# Altium PCB PCB1.PcbDoc
Units mm, origin at the board's own origin, x right, y up, seen from the top; angles counter-clockwise.
Board outline 100 x 75 mm, 2 copper layers (Top Layer, Bottom Layer), stack 1.671 mm thick; 31 components, 20 nets, 120 pads, 1 vias.
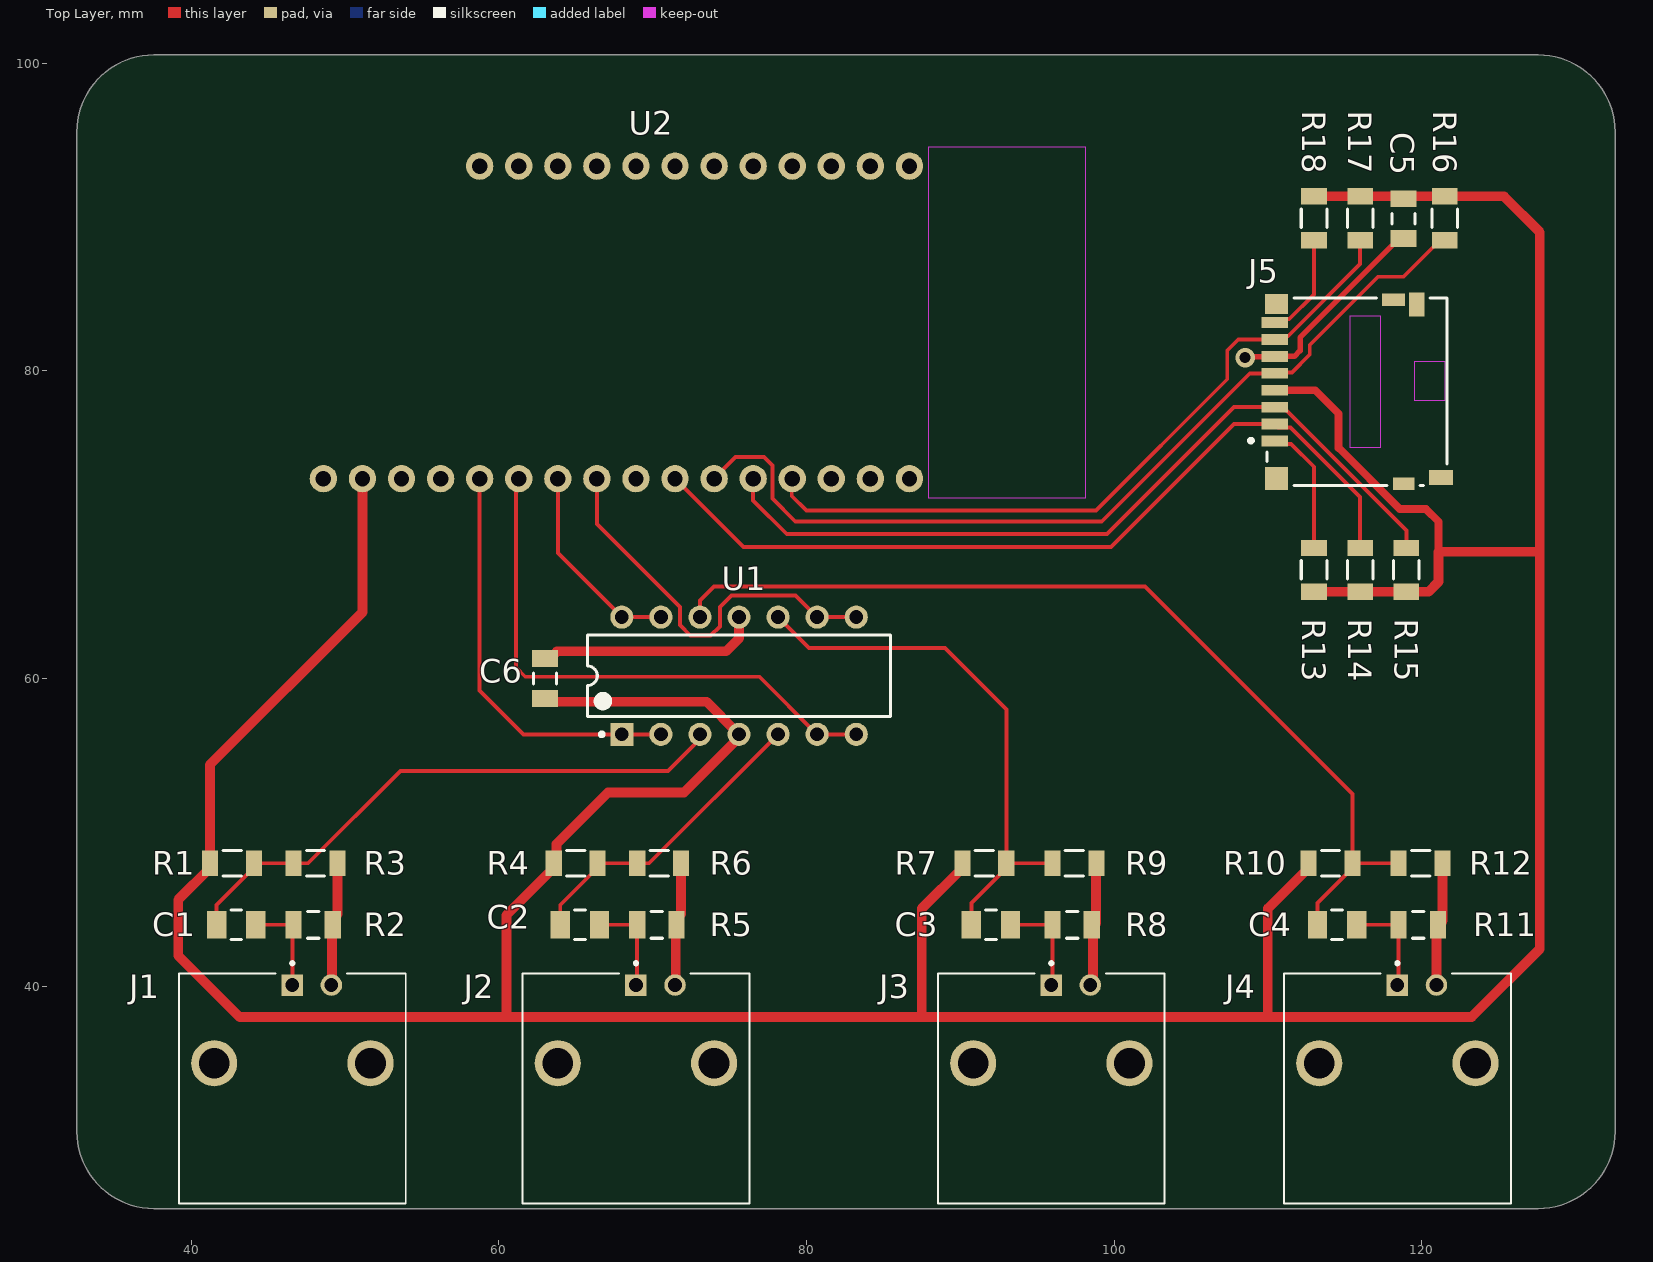
[diagram p0: Top Layer view]
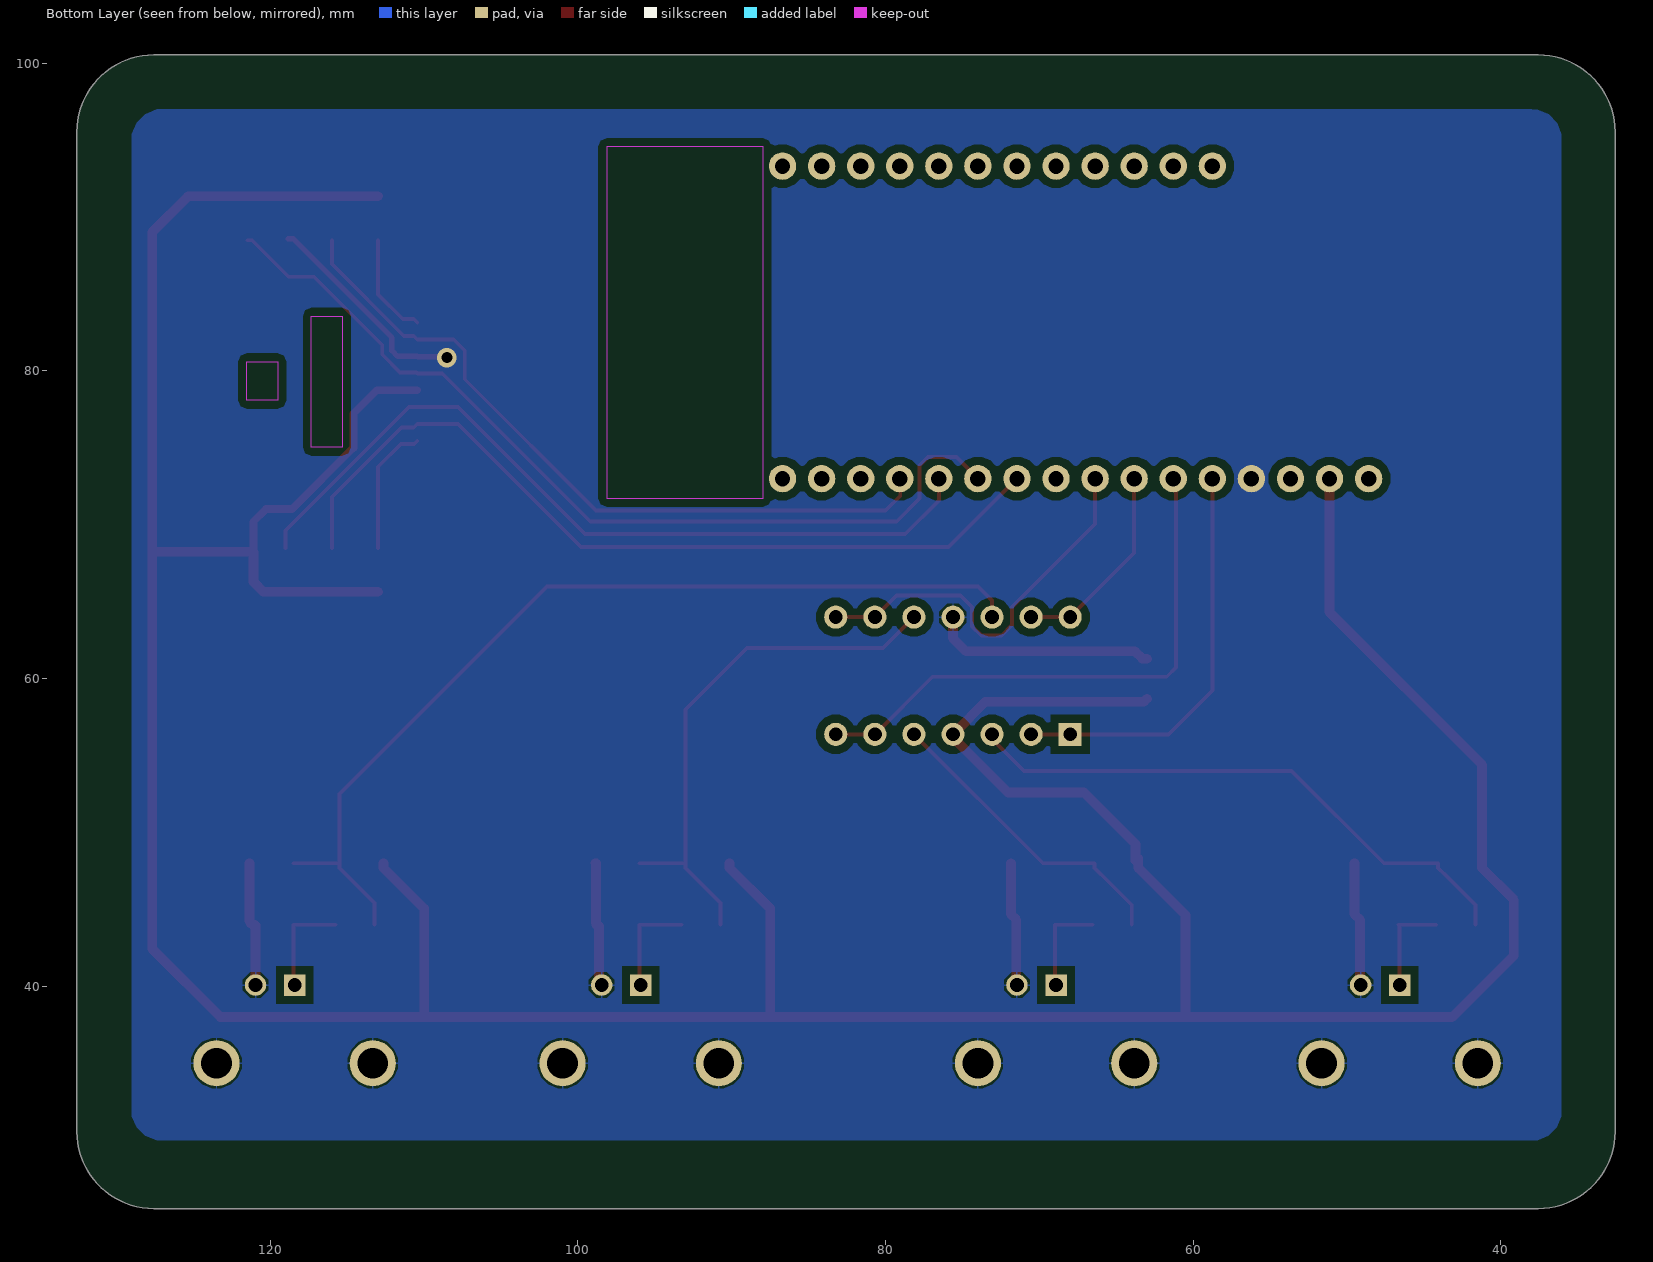
[diagram p1: Bottom Layer view, seen from below]
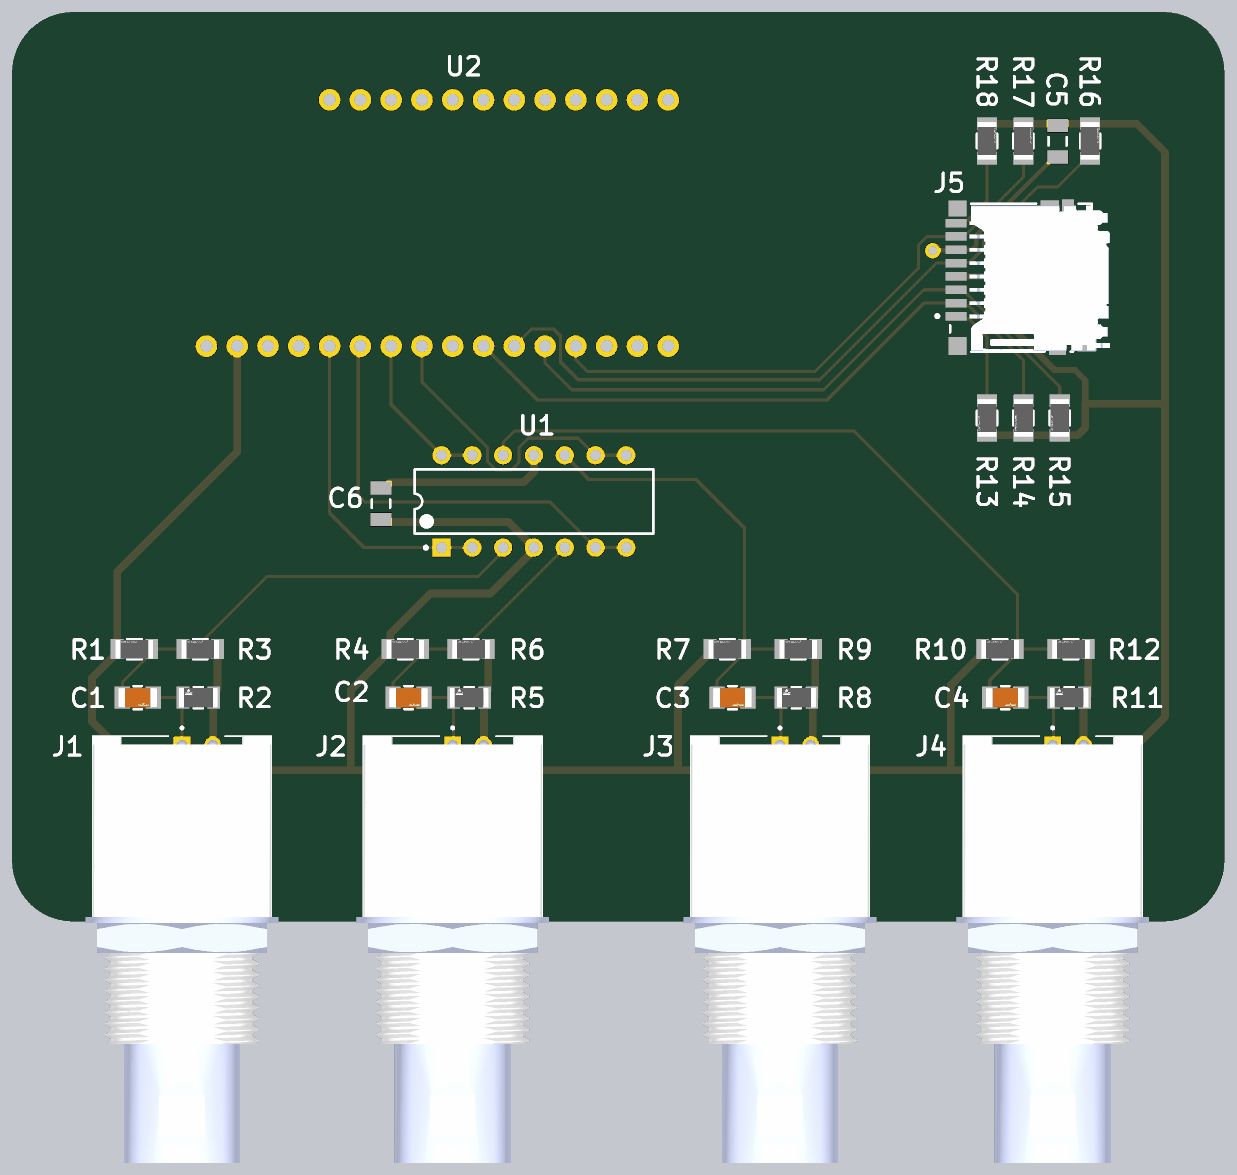
[diagram p2: 3D render of the assembled board from above, using the file's embedded part models]

## Layer stack, top to bottom
Top Solder: solder mask 0.0102, Solder Resist, Dk 3.5
Top Layer: signal copper 0.0356
Dielectric 1: dielectric 1.6, FR-4, Dk 4.8
Bottom Layer: signal copper 0.0356
Bottom Solder: solder mask 0.0102, Solder Resist, Dk 3.5

## Board outline
32.575,30.55 32.575,95.55 cw(c37.575,95.55) 37.575,100.55 127.575,100.55 cw(c127.575,95.55) 132.575,95.55 132.575,30.55 cw(c127.575,30.55) 127.575,25.55 37.575,25.55 cw(c37.575,30.55)

## Design rules (kind name [scope] priority, off if disabled: settings)
BoardOutlineClearance [All] p1: gap=0.2 ignorepadtopadclearanceinfootprint=FALSE
Clearance [All] p1: gap=0.127 ignorepadtopadclearanceinfootprint=TRUE except(0.254: Arc-Hole Track-Hole SMDPad-Hole THPad-Hole Via-Hole Fill-Hole Poly-Hole Region-Hole Text-Hole)
ComponentClearance [All] p1: gap=0.127 collisioncheckmode=3 verticalgap=0.127 showdistances=TRUE
DiffPairsRouting [All] p1: maxlimit=0.254 minlimit=0.127 mostfreqgap=0.127 toplayer_minwidth=0.127 toplayer_maxwidth=25.4 toplayer_prefwidth=0.127 bottomlayer_minwidth=0.127 bottomlayer_maxwidth=25.4 bottomlayer_prefwidth=0.127 maxuncoupledlength=12.7
Height [All] p1: minheight=0 maxheight=1816.048 prefheight=12.7
HoleSize [All] p1: absolutevalues=TRUE maxlimit=6.3 minlimit=0.3 maxpercent=80.000 minpercent=20.000
HoleToHoleClearance [All] p1: gap=0.254 allowstackedmicrovias=FALSE
MinimumAnnularRing [All] p1: minimumring=0.152
MinimumSolderMaskSliver [All] p1: minsoldermaskwidth=0.152
PlaneClearance [All] p1: clearance=0.127
PlaneConnect PlaneConnectPowerPads [InPadClass('PowerPads')] p1: planeconnectstyle=Direct reliefexpansion=0.508 reliefentries=4 reliefconductorwidth=0.254 reliefairgap=0.254
PlaneConnect [All] p2: pad.planeconnectstyle=Relief pad.reliefexpansion=0.3 pad.reliefentries=4 pad.reliefconductorwidth=0.127 pad.reliefairgap=0.127 via.planeconnectstyle=Direct via.reliefexpansion=0.3 via.reliefentries=4 via.reliefconductorwidth=0.127 via.reliefairgap=0.127
PolygonConnect PolygonConnectPowerPads [All vs (InPadClass('PowerPads'))] p1: connectstyle=Direct reliefconductorwidth=0.254 reliefentries=4 polygonreliefangle="90 Angle" airgapwidth=0.254
PolygonConnect [All] p2: thpad.connectstyle=Relief thpad.reliefconductorwidth=0.127 thpad.reliefentries=4 thpad.polygonreliefangle="90 Angle" thpad.airgapwidth=0.127 smdpad.connectstyle=Relief smdpad.reliefconductorwidth=0.127 smdpad.reliefentries=4 smdpad.polygonreliefangle="90 Angle" smdpad.airgapwidth=0.127 via.connectstyle=Direct via.reliefconductorwidth=0.127 via.reliefentries=4 via.polygonreliefangle="90 Angle" via.airgapwidth=0.127
RoutingVias [All] p1: holewidth=0.3 width=0.6 viastyle="Through Hole" minholewidth=0.3 minwidth=0.6 maxholewidth=0.6 maxwidth=6.6
SilkToSilkClearance [All] p1: silktosilkclearance=0.127
SilkToSolderMaskClearance [IsPad] p1: minsilkscreentomaskgap=0.127 clearancetoexposedcopper=TRUE
SolderMaskExpansion [All] p1: expansion=0.051 istentingtop=FALSE
UnRoutedNet [All] p1: checkbadconnections=TRUE
Width Width_10mil [All] p1: maxlimit=25.4 minlimit=0.254 preferedwidth=0.254 minimp=50.000000 maximp=50.000000 favimp=50.000000
Width Width_6mil [All] p2: maxlimit=25.4 minlimit=0.152 preferedwidth=0.152 minimp=50.000000 maximp=50.000000 favimp=50.000000
Width Power_20mil [All] p3: maxlimit=25.4 minlimit=0.508 preferedwidth=0.508 minimp=50.000000 maximp=50.000000 favimp=50.000000
Width Power_12mil [All] p4: maxlimit=25.4 minlimit=0.305 preferedwidth=0.305 minimp=50.000000 maximp=50.000000 favimp=50.000000
Width Width_5mil [All] p5: maxlimit=25.4 minlimit=0.127 preferedwidth=0.127 minimp=50.000000 maximp=50.000000 favimp=50.000000
19 further rules are at their usual default settings.

## Classes and differential pairs
component class Sheet2: C5 J5 R13 R14 R15 R16 R17 R18
component class Sheet1: C1 C2 C3 C4 C6 J1 J2 J3 J4 R1 R2 R3 R4 R5 R6 R7 R8 R9 R10 R11 R12 U2

## Components (designator, comment, footprint, x,y, rotation, side; value= is the part's Value field where it differs from the comment)
C1 "100u" FP-GRM31C-0_3-e0_3_0_8-IPC_C 42.935,44 r0 top
C2 "100u" FP-GRM31C-0_3-e0_3_0_8-IPC_C 65.275,44 r0 top
C3 "100u" FP-GRM31C-0_3-e0_3_0_8-IPC_C 92,44 r0 top
C4 "100u" FP-GRM31C-0_3-e0_3_0_8-IPC_C 114.5,44 r0 top
C5 "1u" CAPC3216X110X50LL20T25 118.825,89.9 r90 top
C6 "1u" CAPC3216X110X50LL20T25 63,60 r270 top
J1 "CONBNC002" LINX_CONBNC002 46.58,35 r0 top
J2 "CONBNC002" LINX_CONBNC002 68.92,35 r0 top
J3 "CONBNC002" LINX_CONBNC002 95.92,35 r0 top
J4 "CONBNC002" LINX_CONBNC002 118.42,35 r0 top
J5 "1140084168" FP-1140084168-0 115.8,78.65 r270 top
R1 "10k" FP-CR1206-IPC_B 42.66,48 r180 top
R2 "1Meg" FP-CRCW1206-e3-MFG 47.935,44 r180 top
R3 "10k" FP-CR1206-IPC_B 48.087,48 r180 top
R4 "10k" FP-CR1206-IPC_B 65,48 r180 top
R5 "1Meg" FP-CRCW1206-e3-MFG 70.275,44 r180 top
R6 "10k" FP-CR1206-IPC_B 70.427,48 r180 top
R7 "10k" FP-CR1206-IPC_B 91.573,48 r180 top
R8 "1Meg" FP-CRCW1206-e3-MFG 97.275,44 r180 top
R9 "10k" FP-CR1206-IPC_B 97.427,48 r180 top
R10 "10k" FP-CR1206-IPC_B 114.073,48 r180 top
R11 "1Meg" FP-CRCW1206-e3-MFG 119.775,44 r180 top
R12 "10k" FP-CR1206-IPC_B 119.927,48 r180 top
R13 "10k" FP-CR1206-IPC_B 113,67.073 r270 top
R14 "10k" FP-CR1206-IPC_B 116,67.073 r270 top
R15 "10k" FP-CR1206-IPC_B 119,67.073 r270 top
R16 "10k" FP-CR1206-IPC_B 121.5,89.927 r90 top
R17 "10k" FP-CR1206-IPC_B 116,89.927 r90 top
R18 "10k" FP-CR1206-IPC_B 113,89.927 r90 top
U1 "MCP6004-I/P" PDIP300-P14 75.62,60.19 r90 top
U2 "Particle Photon 2 Wi-Fi enabled development kit   Footprint and formfactor based on Adafruit Feather." PHOTON2 93.05,71.73 r90 top

## Footprints (in the part's own frame and the unit in brackets; to place one, negate y for a bottom-side part, rotate by r counter-clockwise, add the part's x,y. Pads: shape width x height; smd on the part's side, far side on the other; paste and mask are expansions set on the pad)
CAPC3216X110X50LL20T25 [mm] "Chip Capacitor, 2-Leads, Body 3.20x1.60mm, IPC High Density"
  rect 1.1x1.7 smd: 1(-1.3,0) 2(1.3,0)
  silkscreen extent -0.35,-0.75 0.35,0.75, body extent -1.7,-0.9 1.7,0.9, height 1.1
FP-1140084168-0 [mm]
  rect 0.7x1.75 smd paste+0 mask+0: 1(3.2,-5.35) 2(2.1,-5.35) 3(1,-5.35) 4(-0.1,-5.35) 5(-1.2,-5.35) 6(-2.3,-5.35) 7(-3.4,-5.35) 8(-4.5,-5.35)
  rect 1x1.55 smd paste+0 mask+0: 9(5.575,5.45)
  rect 1.55x1 smd paste+0 mask+0: 10(-5.675,3.875)
  rect 0.8x1.4 smd paste+0 mask+0: 11(5.975,3.025)
  rect 0.8x1.5 smd paste+0 mask+0: 12(-5.975,2.375)
  rect 1.3x1.5 smd paste+0 mask+0: 13(-5.7,-5.225)
  rect 1.5x1.5 smd paste+0 mask+0: 14(5.65,-5.225)
  Keep-Out Layer region: -1.95,3.725 0.55,3.725 0.55,5.725 -1.95,5.725
  Keep-Out Layer region: -4.9,-0.475 3.6,-0.475 3.6,1.525 -4.9,1.525
  silkscreen extent -6.1,-7.02 6.1,5.85, body extent -6.55,-6.32 6.5,6.32, height 0.25
FP-CR1206-IPC_B [mm]
  rect 1.058x1.662 smd paste+0 mask+0: 1(-1.427,0) 2(1.427,0)
  silkscreen extent -0.6,-0.83 0.6,0.83, body extent -2.21,-1.08 2.21,1.08, height 0.25
FP-CRCW1206-e3-MFG [mm]
  rect 1.05x1.8 smd paste+0 mask+0: 1(-1.275,0) 2(1.275,0)
  silkscreen extent -0.38,-0.87 0.38,0.87, body extent -1.9,-1 1.9,1, height 0.25
FP-GRM31C-0_3-e0_3_0_8-IPC_C [mm]
  rect 1.253x1.804 smd paste+0 mask+0: 1(-1.275,0) 2(1.275,0)
  silkscreen extent -0.35,-0.95 0.35,0.95, body extent -2,-1.05 2,1.05, height 0.25
LINX_CONBNC002 [mm]
  rect 1.398x1.398 / inner round 1.398 / far side rect 1.398x1.398 hole 0.89: 1(0,5.08)
  round 1.398 hole 0.89: 2(2.54,5.08)
  round 3 hole 2: S1(-5.08,0) S2(5.08,0)
  silkscreen extent -7.37,-9.12 7.37,6.6, body extent -7.95,-29.38 7.95,5.82, height 14.89
PDIP300-P14 [mm] "DIP, 14-Pin, Row Spacing 7.62 mm, Pitch 2.54 mm"
  rect 1.5x1.5 hole 0.9: 1(-3.81,7.62)
  round 1.5 hole 0.9: 2(-3.81,5.08) 3(-3.81,2.54) 4(-3.81,0) 5(-3.81,-2.54) 6(-3.81,-5.08) 7(-3.81,-7.62) 8(3.81,-7.62) 9(3.81,-5.08) 10(3.81,-2.54) 11(3.81,0) 12(3.81,2.54) 13(3.81,5.08) 14(3.81,7.62)
  silkscreen extent -3.93,-9.85 2.65,9.85, body extent -3.55,-9.85 3.55,9.85, height 5.33
PHOTON2 [mil]
  round 70 hole 39.37: 1(50,1750) 2(50,1650) 3(50,1550) 4(50,1450) 5(50,1350) 6(50,1250) 7(50,1150) 8(50,1050) 9(50,950) 10(50,850) 11(50,750) 12(50,650) 13(50,550) 14(50,450) 15(50,350) 16(50,250) 17(850,250) 18(850,350) 19(850,450) 20(850,550) 21(850,650) 22(850,750) 23(850,850) 24(850,950) 25(850,1050) 26(850,1150) 27(850,1250) 28(850,1350)
  Top Layer keep-out region: 0,-200 0,200 900,200 900,-200
  Bottom Layer keep-out region: 0,-200 0,200 900,200 900,-200

## Part data
C1 C2 C3 C4: library part CMP-06035-046129-1, "Chip Multilayer Ceramic Capacitors for General Purpose, 1206, 100uF, X6T, +22%/-33%, 20%, 6.3V"
C5 C6: library part CMP-2000-06011-1, "Chip Capacitor, 1 uF, +/- 10%, 50 V, -55 to 125 degC, 1206 (3216 Metric), RoHS, Tape and Reel", Capacitance=1uF, Capacitance - nF=1000nF, Case Code - in=1206, Case Code - mm=3216, Case Height=1mm, Case Length=3.2mm, Case Width=1.6mm, Dielectric=X7R, Manufacturer=Kemet, Maximum Operating Temperature=+125C, Minimum Operating Temperature=-55C, Operating Temperature Range=-55Cto+125C, Package / Case=1206(3216metric), Package Description="2-Pin Surface Mount Device, Body 3.2 x 1.6 mm", Temperature Coefficient / Code=+/-15%, Tolerance=10%, Voltage Rating=50V, Brand=Kemet, Class=Class1, Datasheet URL=http://www.kemet.com/docfinder?Partnumber=C1206C105K5RACTU, Datasheet Version=02/2016, Dimensions=1.6mmWx3.2mmLx1mmH, Factory Pack Quantity=2500, Manufacturer URL=http://www.kemet.com/, Mounting Technology=SurfaceMount, Package Reference=1206, Packaging=Reel, Product=GeneralTypeMLCCs, Product Category=MultilayerCeramicCapacitorsMLCC-SMD/SMT, RoHS=Details, Series=C1206C, Termination Style=SMD/SMT, Type=SMDMLCCX7R6.3-250VDCCommericalGrade, Voltage Rating DC=50V
J1 J2 J3 J4: "BNC Jack 50 Ohm PCB Through Hole", Package=None, Check_prices=https://www.snapeda.com/parts/CONBNC002/Linx/view-part/?ref=eda, MF="Linx Technologies Inc.", MP=CONBNC002, SnapEDA_Link=https://www.snapeda.com/parts/CONBNC002/Linx/view-part/?ref=snap
J5: library part CMP-02360-000003-1, "CONN MICRO SD CARD PUSH-PULL R/A", Flammability Rating="UL94 V-0", Package Quantity=7500, Connector Type=Connector, Contact Material="Copper Alloy", Contact Plating=Gold, Depth=11.45mm, Gender=Receptacle, Height=1.55mm, Housing Material=Polymer, Lead Free="Lead Free", Length=15.6mm, Mount="Surface Mount", Number of Contacts=8, Number of Rows=1, Orientation="Right Angle", Packaging="Tape and Reel", Pitch=1.1mm, Radiation Hardening=No, Termination=SMD/SMT
R1 R3 R4 R6 R7 R9 R10 R12 R13 R14 R15 R16 R17 R18: library part CMP-07231-005593-1, "Thick Film Chip Resistors 1206 10kΩ 0.25W 5% 200ppm/°C", Case Code (Imperial)=1206, Case Code (Metric)=3216, Max Operating Temperature=155°C, Max Power Dissipation=250mW, Min Operating Temperature=-55°C, Package Quantity=1, Resistance=10kR, Temperature Coefficient=200ppm/°C, Tolerance=5%, Voltage Rating=200V, Case/Package=1206, Composition="Thick Film", Contact Plating=Tin, Depth=1.6mm, Features="Moisture Resistant", Height=0.6mm, Length=3.2mm, Military Standard=Not, Mount="Surface Mount", Number of Pins=2, Number of Terminations=2, Packaging="Tape and Reel", Power Rating=250mW, Radiation Hardening=No, REACH SVHC="No SVHC", Termination=SMD/SMT, Thickness=610um, Voltage Rating (DC)=200V, Width=1.6mm
R2 R5 R8 R11: library part CMP-2003-01906-2, "RES Thick Film, 1MΩ, 1%, 0.25W, 100ppm/°C, 1206", Case Code (Imperial)=1206, Case Code (Metric)=3216, Max Operating Temperature=155°C, Max Power Dissipation=250mW, Min Operating Temperature=-55°C, Package Quantity=10, Resistance=1MR, Temperature Coefficient=100ppm/°C, Tolerance=1%, Voltage Rating=200V, Case/Package=1206, Composition="Thick Film", Contact Plating=Tin, Depth=1.6mm, Features="Automotive AEC-Q200", Height=0.024inch, Lead Free="Lead Free", Length=3.2mm, Military Standard=Not, Number of Pins=2, Number of Terminations=2, Packaging="Tape and Reel", Power Rating=250mW, Radiation Hardening=No, Termination=SMD/SMT, Voltage Rating (DC)=200V, Weight=0.000353oz, Width=0.063inch, Working Voltage=200V
U1: library part CMP-0187-00122-3, "None", Case/Package=PDIP, Input Bias Current=1pA, Input Offset Voltage (Vos)=4.5mV, Max Operating Temperature=85°C, Max Supply Voltage=6V, Min Operating Temperature=-40°C, Min Supply Voltage=1.8V, Nominal Supply Current=100uA, Operating Supply Voltage=5.5V, Output Current=23mA, Package Quantity=30, Power Supply Rejection Ratio (PSRR)=86dB, Voltage Gain=112dB, Amplifier Type="GENERAL PURPOSE", Common Mode Rejection Ratio=60dB, Gain Bandwidth Product=1MHz, Height=3.3mm, Input Offset Voltage-Max=4.5mV, Lead Free="Lead Free", Length=19.05mm, Mount="Through Hole", Number of Amplifiers=4, Number of Channels=4, Number of Circuits=4, Number of Elements=4, Number of Pins=14, Operating Supply Current=100uA, Output Current per Channel=23mA, Packaging=Rail/Tube, Radiation Hardening=No, REACH SVHC="No SVHC", RoHS Compliant=Yes, Slew Rate=0.6V/µs, Slew Rate-Nom=0.6V/µs, Supply Current=100uA, Technology=CMOS, Unity Gain Bandwidth Product=1MHz, Width=6.35mm
U2: library part PHOTON2, DeviceSetName=PHOTON2, GateName_1=G$1, LibraryName=Particle-Devices, Package=PHOTON2, SymbolName_1=PHOTON2

## Via types
v1: diameter 1.27/1.27 (per signal layer), hole 0.711, Top Layer to Bottom Layer, 1 vias

## Nets (pads, with @x,y where several pads share a name; then routed paths per layer and width w, separated by ;. In a path a pad name is that pad's centre, name@x,y a point inside that pad or via, vN(x,y) a via of type N, cw(c..) or ccw(c..) an arc to the next point about the centre after c; other vN are vias at no path point)
3V3: C5.2 C6.2 J5.4 R1.2 R4.2 R7.2 R10.2 R13.2 R14.2 R15.2 R16.2 R17.2 R18.2 U1.4 U2.2 | length 288
  Top Layer w0.508: J5.4 113.075,78.75 114.6,77.225 114.6,75 118.575,71.025 120.275,71.025 121.1,70.2 121.1,68.25
  Top Layer w0.635: U2.2 51.14,64.315 41.233,54.408 R1.2 41.233,47.698 39.16,45.625 39.16,42 43.16,38 60.5,38 ; C6.2 63.2,58.5 73.5,58.5 U1.4@75.5,56.5 ; R4.2 63.755,48.182 63.755,49.255 67.1,52.6 72.05,52.6 75.62,56.17 U1.4 ; R4.2@63.573,48.302 63.573,47.698 60.5,44.625 60.5,38 ; R7.2 90.146,47.698 87.5,45.052 87.5,38 ; R10.2 112.646,47.698 110,45.052 110,38 ; R13.2 R14.2 R15.2 120.446,65.646 121.1,66.3 121.1,68.25 127.65,68.25 127.675,68.275 ; R18.2 R17.2 R16.2 125.346,91.354 127.675,89.025 127.675,68.275 ; 60.5,38 87.5,38 ; 87.5,38 110,38 ; 110,38 123.25,38 127.675,42.425 127.675,68.275
CS: J5.2 R14.1 U2.10 | length 55
  Top Layer w0.254: U2.10 75.91,68.55 99.8,68.55 107.8,76.55 J5.2 110.673,76.327 111.473,76.327 116,71.8 R14.1
GND: C5.1 C6.1 J1.2 J1.S1 J1.S2 J2.2 J2.S1 J2.S2 J3.2 J3.S1 J3.S2 J4.2 J4.S1 J4.S2 J5.6 R2.1 R3.1 R5.1 R6.1 R8.1 R9.1 R11.1 R12.1 U1.11 U2.4 | length 61
  Top Layer w0.356: v1(108.525,80.875) 108.563,80.913 110.412,80.913 J5.6 111.725,80.95 112.1,81.325 112.1,82.175 118.525,88.6 C5.1
  Top Layer w0.635: J1.2 49.165,40.125 49.165,44.33 49.514,44.679 R3.1 ; C6.1 63.3,61.3 63.775,61.775 74.775,61.775 75.62,62.62 U1.11 ; J2.2 71.505,40.125 71.505,44.33 71.854,44.679 R6.1 ; J3.2 ccw(c98.46,40.245) 98.625,40.245 98.625,43.925 ccw(c98.625,44.125) 98.825,44.125 98.825,47.971 cw(c98.854,47.971) R9.1 ; J4.2 120.96,43.91 cw(c121.05,43.91) R11.1 ccw(c121.05,44.304) 121.354,44.304 R12.1
MISO: J5.7 R17.1 U2.13 | length 47.8
  Top Layer w0.254: U2.13 79.046,72.966 79.046,71.879 80,70.925 98.825,70.925 107.361,79.461 107.361,81.336 108.075,82.05 J5.7 110.673,82.273 111.323,82.273 116,86.95 R17.1
MOSI: J5.3 R15.1 U2.12 | length 52.6
  Top Layer w0.254: U2.12 76.54,71.585 78.725,69.4 99.55,69.4 107.8,77.65 J5.3 110.975,77.65 119,69.625 R15.1
NetJ5_1: J5.1 R13.1 | length 8.5
  Top Layer w0.254: J5.1 110.64,75.26 111.515,75.26 113,73.775 R13.1
NetJ5_8: J5.8 R18.1 | length 6.8
  Top Layer w0.254: J5.8 110.673,83.373 111.393,83.373 113,84.98 R18.1
SCLK: J5.5 R16.1 U2.11 | length 59
  Top Layer w0.254: U2.11 75.4,74.4 77.25,74.4 77.8,73.85 77.8,71.7 79.275,70.225 99.2,70.225 108.825,79.85 J5.5 110.505,79.905 111.557,79.905 112.725,81.072 112.725,81.7 117.15,86.125 118.823,86.125 121.198,88.5 R16.1
VadcA: U1.1 U1.2 U2.5 | length 26.7
  Top Layer w0.254: U2.5 58.76,59.24 61.62,56.38 U1.1 U1.2
VadcB: U1.6 U1.7 U2.6 | length 36.3
  Top Layer w0.254: U2.6 61.125,72.825 61.125,60.725 61.725,60.125 76.955,60.125 U1.6 U1.7
VadcC: U1.13 U1.14 U2.7 | length 13.3
  Top Layer w0.254: U2.7 63.84,68.16 U1.14 U1.13
VadcD: U1.8 U1.9 U2.8 | length 25.9
  Top Layer w0.254: U2.8 66.38,70.045 71.775,64.65 71.775,63.475 72.45,62.8 73.775,62.8 74.375,63.4 74.375,64.65 75.125,65.4 79.3,65.4 U1.9 U1.8
VbiasA: C1.1 R1.1 R3.2 U1.3 | length 37.7
  Top Layer w0.254: C1.1 41.66,45.283 43.673,47.296 43.685,47.296 44.087,47.698 R1.1 R3.2 47.6,48 53.6,54 71,54 73.08,56.08 U1.3
VbiasB: C2.1 R4.1 R6.2 U1.5 | length 20.2
  Top Layer w0.254: C2.1 64,45.283 66.013,47.296 66.025,47.296 66.427,47.698 R4.1 69.78,48 U1.5
VbiasC: C4.1 R10.1 R12.2 U1.12 | length 61.9
  Top Layer w0.254: U1.12 73.08,65.08 74,66 102,66 115.5,52.5 115.5,51 R10.1 ; C4.1 113.225,45.423 115.5,47.698 R10.1 ; R12.2 R10.1
VbiasD: C3.1 R7.1 R9.2 U1.10 | length 35.3
  Top Layer w0.254: U1.10 80.16,62 89,62 93,58 93,51 R7.1 ; C3.1 90.725,45.423 93,47.698 R7.1 ; R9.2 R7.1
VinA: C1.2 J1.1 R2.2 | length 6.4
  Top Layer w0.254: C1.2 R2.2 46.58,43.92 J1.1
VinB: C2.2 J2.1 R5.2 | length 6.4
  Top Layer w0.254: C2.2 R5.2 69,40.16 J2.1
VinC: C4.2 J4.1 R11.2 | length 6.7
  Top Layer w0.254: C4.2 R11.2 118.5,40.16 J4.1
VinD: C3.2 J3.1 R8.2 | length 6.7
  Top Layer w0.254: C3.2 R8.2 96,40.16 J3.1
pads on no net: J5.9 J5.10 J5.11 J5.12 J5.13 J5.14 U2.1 U2.3 U2.9 U2.14 U2.15 U2.16 U2.17 U2.18 U2.19 U2.20 U2.21 U2.22 U2.23 U2.24 U2.25 U2.26 U2.27 U2.28

## Polygon pours and split planes (outlines as drawn)
GND on Bottom Layer "GND_L02_P004" (solid, remove dead copper, pour order 4): 38,30 cw(c38,31.929) 36.071,31.929 36.071,95 cw(c38.036,95.036) 38,97 127,97 cw(c127,95) 129,95 129,31.929 cw(c127.036,31.964) 127,30

## Text inside footprints (layer, text, board x,y; h text height)
J1: Top 3D Body "PCB EDGE" at 55.47,27.38 h1.78
J2: Top 3D Body "PCB EDGE" at 77.81,27.38 h1.78
J3: Top 3D Body "PCB EDGE" at 104.81,27.38 h1.78
J4: Top 3D Body "PCB EDGE" at 127.31,27.38 h1.78
U2: Mechanical 3 "RECOMMENDED ON ALL LAYERS" at 91.069,76.175 h0.94 r90; Mechanical 3 "AND SIGNAL KEEP OUT" at 90.154,76.175 h0.94 r90; Mechanical 3 "GROUND PLANE" at 89.24,76.175 h0.94 r90